# EAGLE board lungmate (EAGLE 5.06)
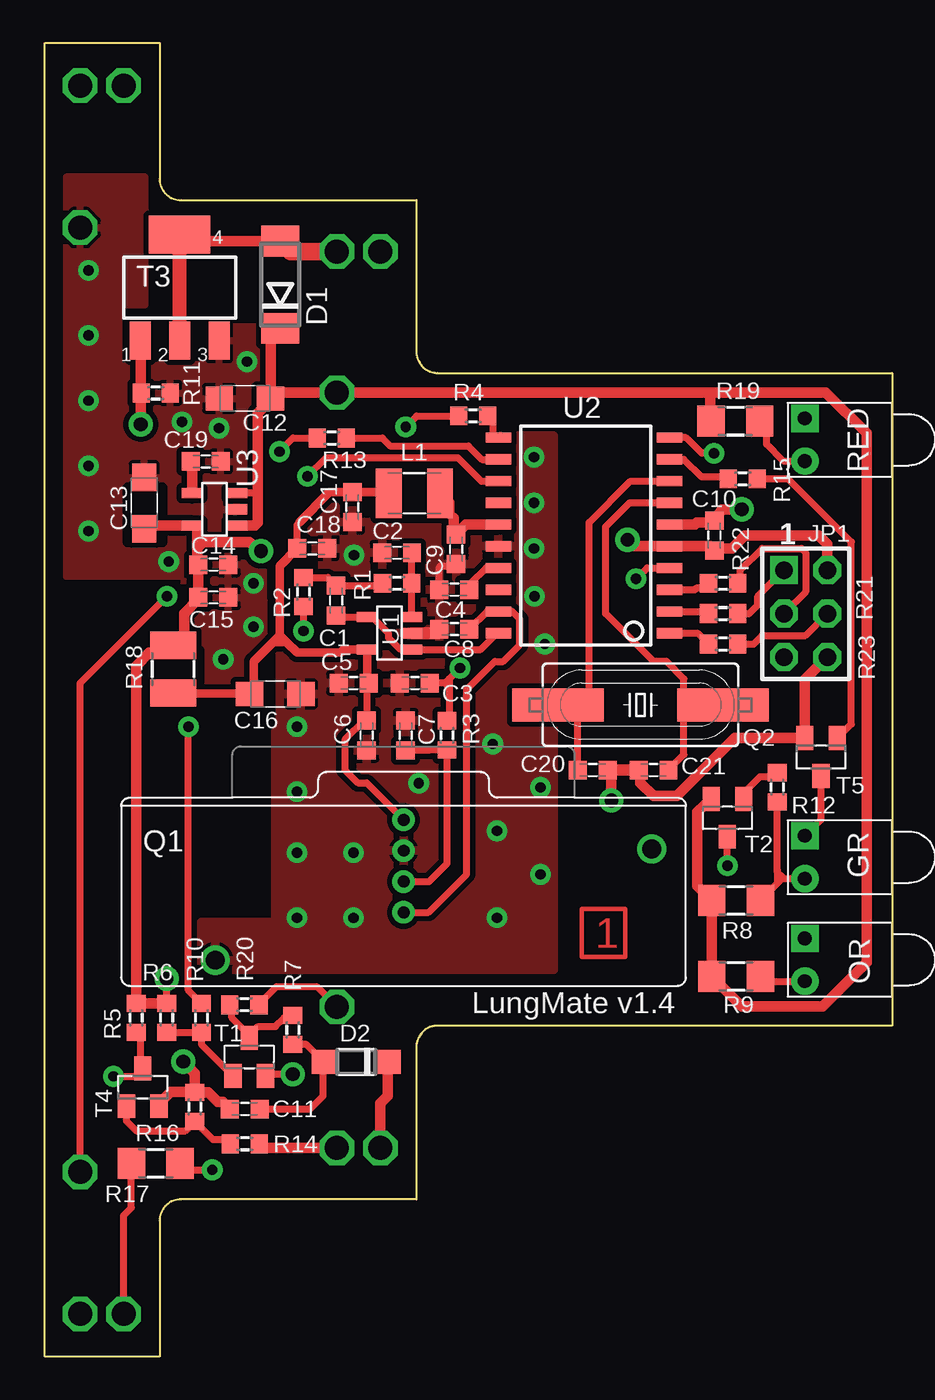
[diagram p0: board, top side]
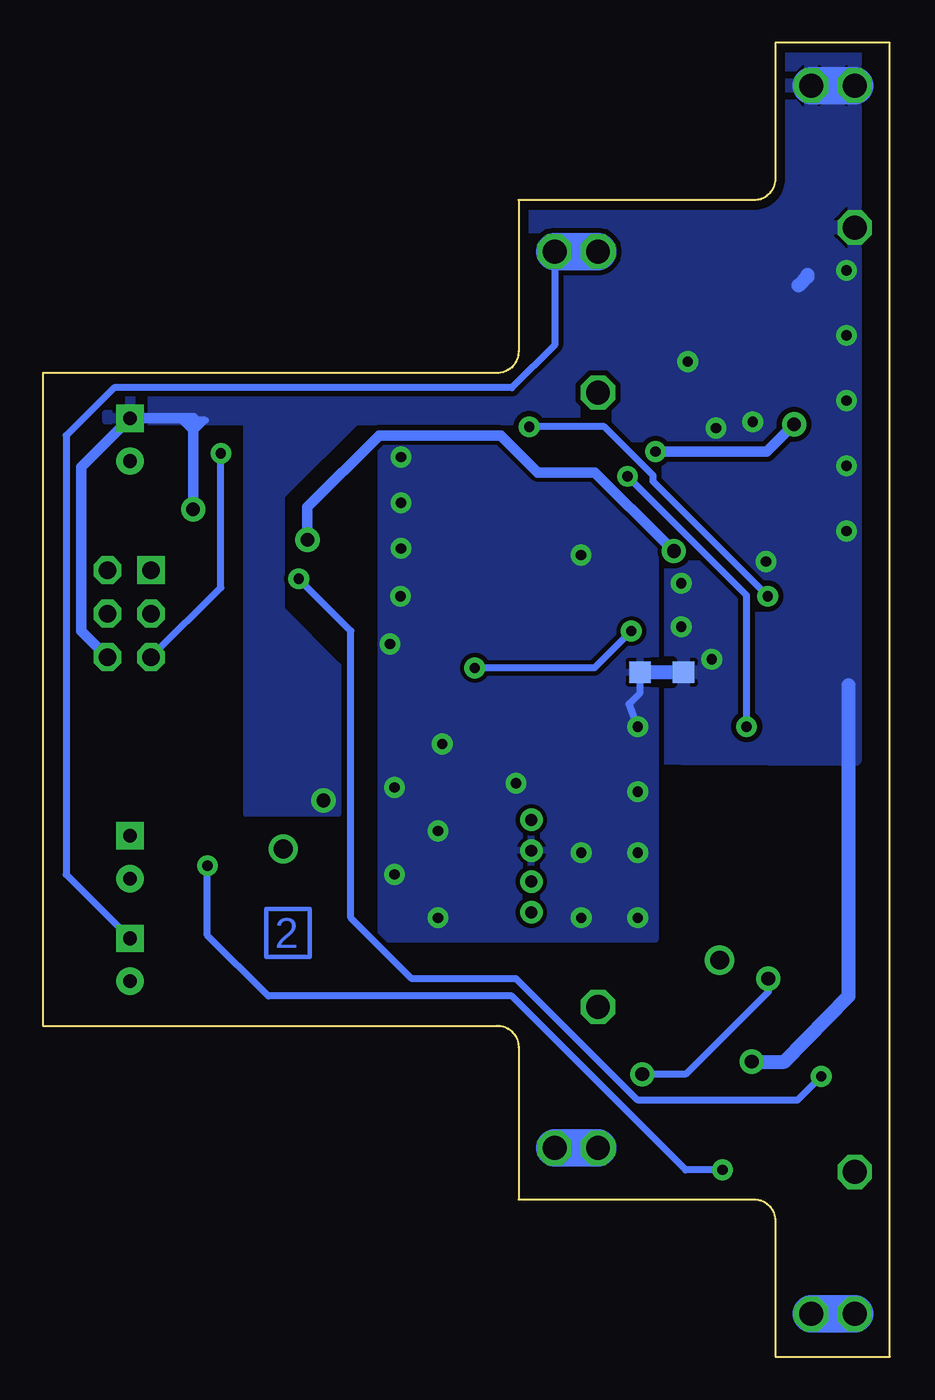
[diagram p1: board, bottom side, seen from below]

Size 49.5 x 76.8 mm. Coordinates in mm from the lower left corner, seen from the top.
Copper layers (1*16): Top 0.035mm / dielectric 1.5mm / Bottom 0.035mm
Design rules "PCB-POOL *": minimum track width 0.4mm, minimum drill 12mil, track to track 10mil, track to pad 10mil, pad to pad 10mil, via to via 10mil, smd to smd 6mil, copper to edge 20mil, drill to drill 8mil, minimum pad ring 12mil, minimum via ring 12mil, stop-mask expansion 3mil, vias tented up to drill 0mil, thermal gap 8mil
tRestrict: area 20.6,49 to 22.6,51.3; area 7,39 to 9,41.3; area 4.8,47.6 to 6.9,50.8

## Footprints (pad centres in the part's own frame; a part is rotated, then mirrored left to right if it is on the bottom)
C0603K = smd 1.05 x 1.08: 1 -0.875,0; 2 0.875,0
SMC_A = smd 1.6 x 1.4: + -1.5,0; - 1.5,0
DO214AA = smd 1.8 x 2.2: A 2.55,0; C -2.55,0
SOD123 = smd 1.4 x 1.4: A 1.9,0; C -1.9,0
AVR-ISP-6 = drill 1.016 square: 1 -2.54,-1.27 | drill 1.016 octagon: 2 -2.54,1.27; 3 0,-1.27; 4 0,1.27; 5 2.54,-1.27; 6 2.54,1.27
91.201 = drill 1.4 octagon: R1.1 2.06,66; R1.2@1 2.06,74.3; R1.2@2 4.6,74.3; R2.1 17.06,56.35; R2.2@1 17.06,64.6; R2.2@2 19.6,64.6; R3.1 17.06,20.45; R3.2@1 17.06,12.2; R3.2@2 19.6,12.2; R4.1 2.06,10.8; R4.2@1 2.06,2.5; R4.2@2 4.6,2.5
C1210K = smd 1.5 x 2.9: 1 -1.5,0; 2 1.5,0
H13X = drill 0.8 pad 1.6 round: A 1.25,0 | drill 0.8 pad 1.6 square: K -1.25,0
HAIS-P = drill 0.7 round: 1 0,8.2; 2 0,6.4; 3 0,4.6; 4 0,2.8 | drill 1.1 round: 5 -11,0; 6 14.5,6.5
HC49UP = smd 5.334 x 1.93: 1 -4.826,0; 2 4.826,0
R0603 = smd 1 x 1.1: 1 -0.85,0; 2 0.85,0
R1206 = smd 1.6 x 1.803: 1 -1.422,0; 2 1.422,0
R1210 = smd 1.6 x 2.7: 1 -1.4,0; 2 1.4,0
SOT23-BEC = smd 1 x 1.4: B -0.95,-1.1; C 0,1.1; E 0.95,-1.1
SOT223 = smd 1.219 x 2.235: 1 -2.311,-3.099; 2 0,-3.099; 3 2.311,-3.099 | smd 3.6 x 2.2: 4 0,3.099
SOT23 = smd 1 x 1.4: 1 -0.95,-1.1; 2 0.95,-1.1; 3 0,1.1
SOT23-5 = smd 0.6 x 1.2: 1 -0.95,-1.306; 2 0,-1.306; 3 0.95,-1.306; 4 0.95,1.306; 5 -0.95,1.306
SOIC20S = smd 0.6 x 1.5: 1 -5.715,-5; 2 -4.445,-5; 3 -3.175,-5; 4 -1.905,-5; 5 -0.635,-5; 6 0.635,-5; 7 1.905,-5; 8 3.175,-5; 9 4.445,-5; 10 5.715,-5; 11 5.715,5; 12 4.445,5; 13 3.175,5; 14 1.905,5; 15 0.635,5; 16 -0.635,5; 17 -1.905,5; 18 -3.175,5; 19 -4.445,5; 20 -5.715,5
GND-GNDA = smd 1.27 x 1.27: GND -1.27,0; GNDA 1.27,0

## Placement (x,y rotation side)
C1  100n  [C0603K]  17.02,44.2 90 top
C2  10n  [C0603K]  20.57,46.99 180 top
C3  68n  [C0603K]  21.62,39.37 180 top
C4  47n  [C0603K]  23.93,44.83 180 top
C5  100n  [C0603K]  18.03,39.37 180 top
C6  47n  [C0603K]  18.8,36.32 270 top
C7  4n7  [C0603K]  21.08,36.32 90 top
C8  47n  [C0603K]  23.93,42.53 180 top
C9  100n  [C0603K]  24.03,47.19 270 top
C10  1u  [C0603K]  39.12,48.01 270 top
C11  100n  [C0603K]  11.68,14.48 180 top
C12  2u2  [SMC_A]  11.68,56.01 180 top
C13  2u2  [SMC_A]  5.8,49.9 90 top
C14  100n  [C0603K]  9.84,46.29 0 top
C15  100p  [C0603K]  9.84,44.39 0 top
C16  2u2  [SMC_A]  13.46,38.73 0 top
C17  100n  [C0603K]  17.96,49.66 270 top
C18  100p  [C0603K]  15.62,47.24 0 top
C19  4n7  [C0603K]  9.4,52.32 0 top
C20  22p  [C0603K]  32,34.29 180 top
C21  22p  [C0603K]  35.56,34.29 0 top
D1  GF1A  [DO214AA]  13.75,62.65 90 top
D2  BAT54  [SOD123]  18.19,17.23 180 top
JP1  AVR-ISP-6  [AVR-ISP-6]  44.45,43.43 270 top
K2  91.201S  [91.201]  0,0 0 top
L1  10u  [C1210K]  21.59,50.47 0 top
LED1  YELLOW  [H13X]  44.4,23.2 270 top
LED2  GREEN  [H13X]  44.4,29.2 270 top
LED3  RED  [H13X]  44.4,53.6 270 top
Q1  HAIS-50P  [HAIS-P]  20.95,23.18 0 top
Q2  8.192MHz  [HC49UP]  34.8,38.1 180 top
R1  42k2  [R0603]  20.57,45.21 0 top
R2  47k5  [R0603]  15.11,44.7 90 top
R3  29k4  [R0603]  23.5,36.32 90 top
R4  330  [R0603]  25.02,54.99 180 top
R5  10k  [R0603]  5.33,19.81 90 top
R6  100k  [R0603]  7.11,19.81 90 top
R7  4k7  [R0603]  14.48,19.1 90 top
R8  680  [R1206]  40.39,26.67 0 top
R9  680  [R1206]  40.39,22.23 0 top
R10  10k  [R0603]  9.14,19.81 90 top
R11  100k  [R0603]  6.48,56.33 0 top
R12  10k  [R0603]  42.79,33.28 90 top
R13  10k  [R0603]  16.76,53.69 180 top
R14  10k  [R0603]  11.68,12.45 0 top
R15  10k  [R0603]  40.77,51.31 0 top
R16  100k  [R0603]  8.76,14.61 270 top
R17  680  [R1206]  6.48,11.3 180 top
R18  10 1/4W  [R1210]  7.49,40.2 270 top
R19  680  [R1206]  40.34,54.68 0 top
R20  270  [R0603]  11.66,20.57 0 top
R21  270  [R0603]  39.62,43.43 180 top
R22  270  [R0603]  39.62,45.21 180 top
R23  270  [R0603]  39.62,41.66 180 top
T1  BC857C  [SOT23-BEC]  11.94,17.53 0 top
T2  BC857C  [SOT23-BEC]  39.88,31.5 180 top
T3  FZTA14  [SOT223]  7.87,62.48 0 top
T4  BC848  [SOT23]  5.71,15.75 0 top
T5  BC848  [SOT23]  45.35,35.05 180 top
U1  MCP6001  [SOT23-5]  20.13,42.29 90 top
U2  ATtiny861  [SOIC20S]  31.5,48.01 90 top
U3  MIC5205U  [SOT23-5]  9.91,49.53 90 top
~NUDEV~  GND-GNDA  [GND-GNDA]  13.34,40.01 180 bottom

## Library data of the parts
C1 C2 = rcl; TOL: 5%
C3 = rcl; DIE: X7R; TOL: 5%
C4-C11 C14 C15 C17-C21 L1 R1-R23 = rcl
C12 C13 C16 = rcl; V: 16v
D1 D2 = diode
JP1 U2 = avr-4
K2 = altech
LED1 = led; COLOR: LOAD
LED2 = led; COLOR: MODE
LED3 = led; COLOR: ON/OFF
Q1 = lem
Q2 = crystal
T1 T2 = transistor-pnp
T3-T5 = transistor
U1 = burr-brown
U3 = micrel
~NUDEV~ = supply1

## Nets
!RESET: JP1.5 U2.10
+5V: C5.1 C6.1 C16.+ C17.1 C18.1 L1.1 Q1.1 R18.2 U1.5
+12V: C12.+ D1.C K2.R2.1 R8.1 R9.1 R19.1 T2.E U3.1 U3.3
CS_REF: C8.1 Q1.4 U2.19
DATA_IN: R10.2 U2.13
DATA_OUT: R5.1 T4.3 U2.4
EXT_LED: K2.R4.2@1 K2.R4.2@2 R17.2
EXT_SW: K2.R4.1 R4.2
FILTERED_SIGNAL: C1.1 U1.1 U1.4 U2.20
GND: C10.1 C11.2 C12.- C13.- C14.2 C15.2 C19.2 C20.1 C21.1 JP1.6 K2.R1.1 K2.R1.2@1 K2.R1.2@2 LED3.K R11.2 R16.1 T3.3 T4.2 T5.2 U2.6 U3.2 ~NUDEV~.GND
GNDA: C2.2 C3.2 C4.2 C5.2 C6.2 C7.2 C8.2 C9.2 C16.- C17.2 C18.2 Q1.2 Q1.5 U1.2 U2.16 ~NUDEV~.GNDA
MISO: R21.2 U2.2
MOSI: R23.2 U2.1
N$1: C20.2 Q2.2 U2.8
N$2: C11.1 D2.A R7.1
N$3: R6.1 R10.1 T1.B
N$4: C7.1 Q1.3 R3.1
N$5: JP1.1 R21.1
N$6: C3.1 R2.1 R3.2
N$7: C1.2 R1.1 R2.2
N$8: C2.1 R1.2 U1.3
N$9: C9.1 L1.2 U2.15
N$10: R17.1 T2.C
N$11: C4.1 U2.17
N$12: LED3.A R19.2
N$13: R15.2 T5.1
N$14: R12.2 T2.B
N$16: LED2.A R8.2 R12.1
N$17: R15.1 U2.9
N$18: R14.1 R16.2 T4.1
N$19: R4.1 U2.11
N$20: C21.2 Q2.1 U2.7
N$21: LED1.A R9.2
N$22: C19.1 U3.4
N$23: R13.1 U2.12
N$24: JP1.4 R23.1
N$25: LED2.K T5.3
N$26: JP1.3 R22.1
N$27: R7.2 R20.1 T1.C
RELAY_COIL: D1.A K2.R2.2@1 K2.R2.2@2 LED1.K T3.2 T3.4
RELAY_CTRL: R11.1 R13.2 T3.1
SCK: R22.2 U2.3
SERIAL_IN: D2.C K2.R3.2@1 K2.R3.2@2 R14.2
SERIAL_OUT: K2.R3.1 R20.2
VCC: C10.2 C13.+ C14.1 C15.1 JP1.2 R5.2 R6.2 R18.1 T1.E U2.5 U3.5

## Tracks (layer width: path | path; a pad name or v marks a point on that pad's centre or on a via)
!RESET  (via drill 0.6)
  Top 0.406: v39.1,52.81 38.38,52.81 37.47,53.72 U2.10
  Bottom 0.406: JP1.5 39.1,44.95 v39.1,52.81
+5V
  Top 0.406: 12.19,38.97 C16.+ 11.94,38.73 | C18.1 14.75,48.66 14.86,48.77 | Q1.1 18.8,33.54 18.28,33.54 17.53,34.29 17.53,36.07 18.66,37.2 C6.1 18.8,39.26 C5.1
  Top 0.508: C16.+ 11.94,38.76 7.53,38.76 | 13.72,42.16 13.97,41.91 | 13.72,42.16 14.1,41.78 | 14.1,41.78 14.73,41.15 17.27,41.15 17.46,41.34 U1.5 18.82,39.46 C5.1 | 13.72,42.16 13.72,46.23 14.75,47.26 C18.1 | 13.34,41.78 12.19,40.64 12.19,38.97 | 13.34,41.78 13.72,42.16 | 13.34,41.78 14.1,41.78 | L1.1 20.1,50.53 C17.1 16.62,50.53 14.86,48.77
  Top 0.61: R18.2 7.53,38.76
+12V
  Top 0.406: U3.3 12.45,50.48 12.45,50.5 | 38.86,54.74 R19.1
  Top 0.61: U3.1 12.26,48.58 12.45,48.77 12.45,50.5 12.45,55.16 12.95,55.67 12.95,55.78 C12.+ | D1.C 13.18,60.1 C12.+ | 38.86,56.35 45.63,56.35 48.01,53.98 48.01,23.04 45.44,20.47 40.72,20.47 R9.1 R8.1 38.12,27.51 38.12,31.83 T2.E | 38.86,56.35 K2.R2.1 13.53,56.35 C12.+ | 38.86,56.35 38.86,54.74
CS_REF
  Top 0.406: Q1.4 22.42,25.98 24.64,28.19 24.64,38.99 26.29,40.64 26.77,40.64 27.74,41.6 27.74,43.13 27.3,43.56 U2.19 25.83,43.56 C8.1
DATA_IN  (via drill 0.6)
  Top 0.406: v15.34,51.46 16.43,52.55 24.13,52.55 25.5,51.18 U2.13 | R10.2 8.38,21.42 v8.38,36.83
  Bottom 0.406: v15.34,51.46 8.38,44.5 v8.38,36.83
DATA_OUT  (via drill 0.6)
  Top 0.4: v4.01,16.38 5.25,16.38 T4.3
  Top 0.406: U2.4 35.18,46.1 v34.54,45.47 | 5.59,18.8 5.5,18.8 R5.1 5.59,18.96 5.59,16.98 T4.3
  Bottom 0.406: v4.01,16.38 5.41,14.99 14.73,14.99 21.84,22.1 27.94,22.1 31.5,25.65 31.5,42.42 v34.54,45.47
EXT_LED
  Top 0.406: K2.R4.2@2 4.6,8.26 5.05,8.71 R17.2
  Bottom 2.184: K2.R4.2@1 K2.R4.2@2
EXT_SW  (via drill 0.6)
  Top 0.406: v21.08,54.36 21.72,54.99 R4.2 | 2.06,15.9 K2.R4.1 2.06,38.61 | 2.06,38.61 2.06,39.27 | v7.14,44.45 2.06,39.37 2.06,38.61
  Bottom 0.406: 21,54.28 v21.08,54.36 16.69,54.36 13.84,51.51 13.84,51.16 v7.14,44.45
FILTERED_SIGNAL
  Top 0.4: U1.1 20.76,41.34 20.07,42.04 20.07,42.29 19.12,43.24 U1.4
  Top 0.406: U1.1 25.47,41.34 26.42,42.29 U2.20 | U1.4 17.1,43.24 C1.1
GND  (via drill 0.6, 0.8 pad 1)
  Top 0.406: T4.2 6.67,14.79 | 8.72,15.49 R16.1 | C11.2 10.67,14.48 10.67,14.62
  Top 0.61: 10.27,55.92 C12.- 10.18,55.65 | 10.67,14.62 10.39,14.9 10.11,14.9 9.55,15.46 R16.1 8.76,16.56 v8.08,17.25 | 6.67,14.79 7.37,15.49 8.72,15.49 | JP1.6 44.4,39.57 T5.2 40.32,36.15 36.93,32.77 | v40.72,49.53 39.54,49.53 C10.1 39,48.77 38.1,48.77 37.97,48.64 U2.6 | C20.1 33.1,34.29 v33.1,32.51 | 36.83,32.77 35.56,32.77 34.8,33.53 34.8,34.29 34.54,34.29
  Top 0.66: C20.1 34.54,34.29 C21.1
  Bottom 0.406: 40.64,54.1 40.01,54.74 41.4,54.74 40.77,54.1
  Bottom 0.61: JP1.6 47.24,42.42 47.24,52.01 LED3.K 40.72,54.85 v40.72,49.53
  Bottom 0.813: 4.83,63.25 4.83,63.12 5.33,62.61 | v8.08,17.25 6.17,17.25 2.41,21.08 2.41,39.24 | ~NUDEV~.GND 14.48,40.01
  Bottom 2.184: K2.R1.2@1 K2.R1.2@2
  other vias: 10.41,40.77 12.19,45.21 12.19,42.67 8.02,54.65 7.24,46.48 11.81,58.17 10.17,54.27 2.54,55.88 2.54,52.07 2.54,59.69 2.54,48.26 2.54,63.5
  pour Bottom (isolate 0.3, rank 2): 2.03,34.92 2.03,76.45 22.35,76.58 22.35,35.05
  pour Top (isolate 0.305): 1.27,57.91 10.16,58.04 10.03,60.2 21.08,60.2 21.08,55.24 12.7,55.24 12.83,37.72 8.13,37.72 8.13,45.59 1.27,45.59
  pour Top (isolate 0.305): 1.27,68.96 5.84,68.96 5.84,61.47 4.32,61.47 4.32,58.04 1.27,58.04
  pour Bottom (isolate 0.305): 22.35,56.01 22.35,54.74 45.72,54.74 45.72,56.01
  pour Bottom: 30.99,54.86 35.56,50.29 35.56,43.69 32.26,40.39 32.26,31.75 37.59,31.75 37.59,55.12 30.99,55.12
GNDA  (via drill 0.6)
  Top 0.406: C4.2 23.05,46.17 23.11,46.23 23.94,46.23 C9.2 | 23.01,42.29 23.01,42.49 C8.2
  Top 0.711: U1.2 23.01,42.29
  Bottom 0.406: ~NUDEV~.GNDA 14.6,38.8 15.24,38.16 v14.73,36.83
  other vias: 29.21,41.66 14.73,33.02 14.73,29.46 26.16,35.81 18.03,29.46 18.03,25.65 28.96,28.19 26.42,25.65 26.42,30.73 28.96,33.27 28.57,49.91 28.57,52.58 18.06,46.86 14.73,25.65 28.57,47.24 28.6,44.45 21.84,33.53
  pour Bottom (isolate 0.254): 13.72,24.38 29.72,24.38 29.72,53.47 13.72,53.47
  pour Top (isolate 0.305): 9.14,22.61 29.72,22.61 29.72,53.85 13.72,53.85 13.72,36.7 13.46,36.58 13.46,25.4 9.14,25.4
MISO
  Top 0.406: U2.2 38.73,43.56 38.86,43.69 38.52,43.18 R21.2
MOSI
  Top 0.406: U2.1 38.14,42.29 R23.2
N$1
  Top 0.406: C20.2 31.13,37.7 Q2.2 28.42,37.9 31.8,37.9 31.8,48.77 34.21,51.18 U2.8
N$2
  Top 0.406: C11.1 15.49,14.48 16.26,15.24 16.26,17.2 D2.A 15.27,18.25 R7.1
N$3
  Top 0.406: R6.1 R10.1 9.14,18.27 T1.B
N$4
  Top 0.406: C7.1 22.45,35.45 R3.1 23.5,28.83 22.44,27.78 Q1.3
N$5
  Top 0.406: R21.1 41.15,43.43 41.66,43.94 41.66,44.45 JP1.1
N$6  (via drill 0.6, 0.6 pad 0.6)
  Top 0.406: v15.11,42.42 R2.1 | v24.26,40.26 23.62,39.62 | 23.62,39.62 23.62,39.37 | 23.62,39.37 23.62,39.12 | 23.62,39.12 23.62,37.3 R3.2 | C3.1 22.49,39.51 22.61,39.62 22.61,39.37 23.37,39.37 | 23.62,39.37 23.37,39.37 | 23.62,39.62 23.37,39.37 | 23.37,39.37 23.62,39.12
  Bottom 0.406: v15.11,42.42 17.27,40.26 v24.26,40.26
N$7
  Top 0.406: R2.2 16.54,45.55 C1.2 19.58,45.07 R1.1
N$8
  Top 0.4: C2.1 21.42,46.99 R1.2 21.42,43.24 U1.3
N$9
  Top 0.406: C9.1 24.09,48.13 24,48.13 23.88,48.26 | 23.88,49.02 23.62,49.28 | 23.62,49.94 L1.2
  Top 0.61: 23.88,48.26 23.88,49.02 | 23.62,49.28 23.62,49.94 | U2.15 24.6,48.64 C9.1
N$10  (via drill 0.6)
  Top 0.406: v39.88,28.7 T2.C | v9.78,10.92 8.28,10.92 R17.1
  Bottom 0.406: v9.78,10.92 11.94,10.92 22.1,21.08 36.32,21.08 39.88,24.64 v39.88,28.7
N$11
  Top 0.406: C4.1 24.8,44.87 24.89,44.96 24.89,45.21 25.78,46.1 U2.17
N$12
  Top 0.406: 41.91,54.54 R19.2 42.16,54.28 42.16,53.34 43.15,52.35 LED3.A
N$13
  Top 0.406: T5.1 47.12,36.98 47.12,47.62 43.44,51.31 42.93,51.31 R15.2
N$14
  Top 0.406: T2.B 40.83,32.95 41.78,33.91 42.56,33.91 R12.2
N$16
  Top 0.406: 43.09,27.95 LED2.A | R8.2 43.09,27.95 | 43.09,27.95 43.09,28.03 42.8,28.32 42.8,28.45 | 42.8,28.45 R12.1 | 42.8,28.45 42.8,27.81 42.8,27.69
N$17
  Top 0.406: R15.1 39.79,51.44 38.35,51.44 37.34,52.45 U2.9
N$18
  Top 0.4: R14.1 10.58,12.7 9.82,12.7 R16.2
  Top 0.406: T4.1 4.76,13.78 5.33,13.21 8.22,13.21 R16.2
N$19
  Top 0.406: R4.1 26.16,54.99 26.16,53.85 26.62,53.85 U2.11
N$20
  Top 0.406: U2.7 34.16,49.91 32.77,48.51 32.77,43.43 35.56,40.64 36.32,40.64 37.34,39.62 37.34,38.1 | 39.88,38.61 Q2.1 37.34,38.1 | C21.2 37.34,35.19 37.34,38.1
N$21
  Top 0.406: R9.2 42.09,21.95 LED1.A
N$22
  Top 0.61: U3.4 8.6,52.15 C19.1
N$23
  Top 0.406: R13.1 19.71,53.7 20.17,53.24 24.74,53.24 25.53,52.45 U2.12
N$24
  Top 0.406: R23.1 41.4,41.66 41.91,42.16 44.45,42.16 JP1.4
N$25
  Top 0.406: LED2.K 45.35,31.4 T5.3
N$26
  Top 0.406: JP1.3 44.45,44.7 44.45,46.99 44.2,47.24 41.91,47.24 40.64,45.97 40.64,45.38 R22.1
N$27
  Top 0.406: T1.C 12.19,19.05 | 12.19,19.05 12.45,19.3 13.46,19.3 13.97,19.81 R7.2 | 12.19,19.05 11.68,19.05 10.92,19.81 10.92,20.46 R20.1
N$32
  Top 0.254: 31.37,23.37 31.37,26.16 33.91,26.16 33.91,23.37 31.37,23.37
N$33
  Bottom 0.254: 33.91,23.37 33.91,26.16 36.45,26.16 36.45,23.37 33.91,23.37
RELAY_COIL
  Top 0.61: 13.75,64.6 D1.A 7.87,65.2 7.87,64.9
  Top 0.813: T3.2 7.87,64.9 T3.4 8.36,65.1
  Top 1.016: K2.R2.2@1 14.35,64.6 D1.A
  Bottom 0.406: LED1.K 48.13,28.18 48.13,53.85 45.34,56.64 22.1,56.64 19.6,59.14 K2.R2.2@2
  Bottom 2.184: K2.R2.2@1 K2.R2.2@2
RELAY_CTRL  (via drill 0.6, 0.8)
  Top 0.406: v13.7,52.9 14.49,53.7 R13.2 | v5.6,54.5 5.63,54.5 R11.1
  Top 0.61: T3.1 5.6,59.38 v5.6,54.5
  Bottom 0.61: v13.7,52.9 7.2,52.9 v5.6,54.5
SCK
  Top 0.406: U2.3 37.97,44.83 38.1,44.96 38.52,44.96 R22.2
SERIAL_IN
  Top 0.61: K2.R3.2@2 19.6,14.8 20.04,15.24 20.04,17.19 D2.C | K2.R3.2@1 12.78,12.2 R14.2
  Bottom 2.184: K2.R3.2@1 K2.R3.2@2
SERIAL_OUT
  Top 0.406: R20.2 12.51,20.61 13.54,21.64 15.87,21.64 K2.R3.1
VCC  (via drill 0.8)
  Top 0.406: 8.89,47.12 9.4,47.62 8.89,48.13 | T1.E 12.97,16.51 v14.48,16.51 | R6.2 v7.11,22.1
  Top 0.508: 8.82,48.58 U3.5 | 8.97,44.27 C15.1 | 8.13,42.23 R18.1 7.05,41.6 6.6,41.15
  Top 0.61: R6.2 R5.2 5.33,40.39 6.1,41.15 6.6,41.15 | v12.62,47.09 11.94,47.62 9.4,47.62 9.02,47.62 arc90 8.89,47.5 | U3.5 5.8,48.58 C13.+ | C15.1 C14.1 8.89,46.37 8.89,47.12 8.89,47.5 | 8.97,44.27 8.13,43.43 8.13,42.23 | JP1.2 45.72,47.5 45.21,48.01 40.89,48.01 40.13,47.24 39.23,47.24 C10.2 38.88,47.37 U2.5 34.42,47.37 v34.04,47.75 | 8.82,48.58 8.89,48.51 8.89,48.13 8.89,47.5
  Bottom 0.406: v14.48,16.51 11.94,16.51 7.11,21.34 v7.11,22.1
  Bottom 0.61: v34.04,47.75 34.04,49.66 29.84,53.85 22.73,53.85 20.57,51.69 17.25,51.69 13.11,47.55 v12.62,47.09

## Text on the board
Top: 1
Bottom: 2
tPlace: RED | 1 | GR | OR | LungMate v1.4
Measures: 3" [76.8mm] | [49.5mm]